# Altium PCB TIDA-010954-RevB.PcbDoc (part 7 of 8)
Units mm, origin at the board's own origin, x right, y up, seen from the top; angles counter-clockwise.
Board outline 290 x 100 mm, 6 copper layers (Top Layer, Mid1, Mid2, Mid3, Mid4, Bottom Layer), stack 1.59 mm thick; 394 components, 204 nets, 1137 pads, 2188 vias.
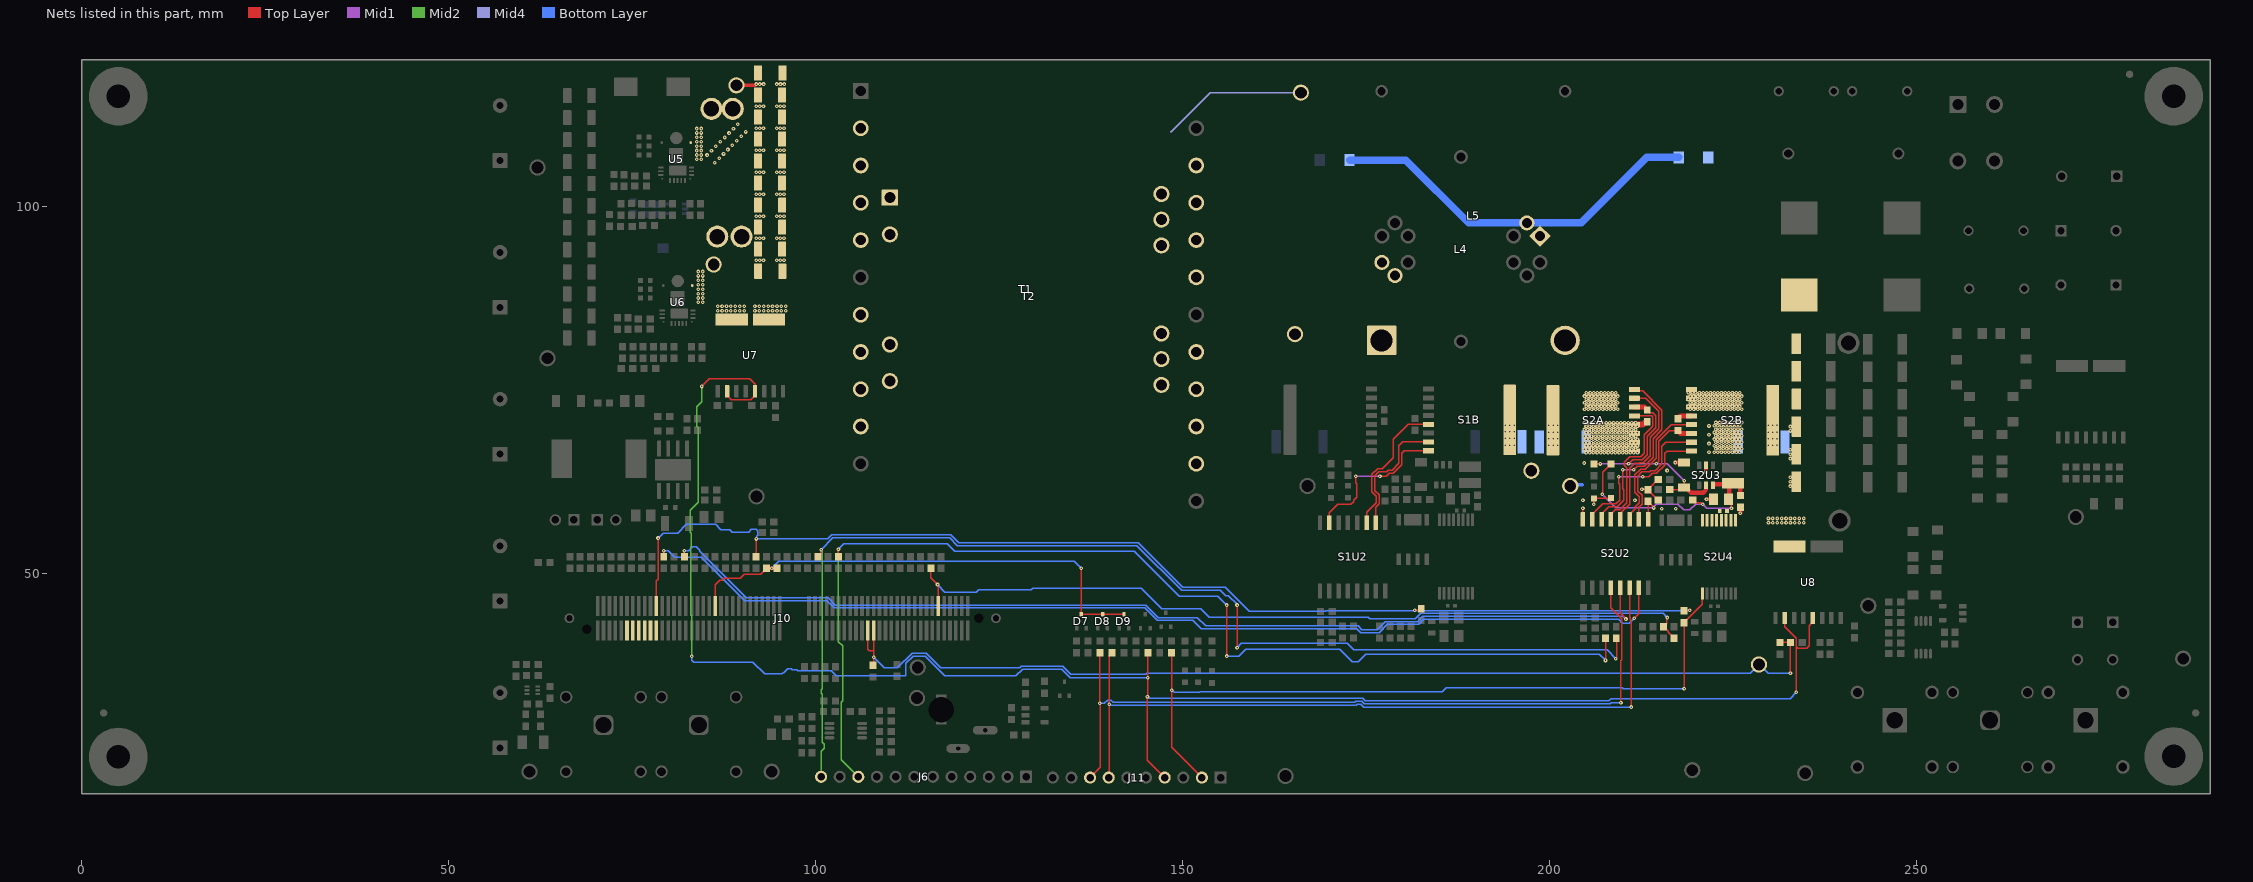
[diagram p9: the nets of this part, all layers, seen from the top]

## Via types
v1: diameter 0.5, hole 0.2, Top Layer to Bottom Layer, tented both sides, 1333 vias
v2: diameter 0.5/0.5/0.5/0.5/0.5/0.5 (per signal layer), hole 0.2, Top Layer to Bottom Layer, tented both sides, 847 vias
v3: diameter 0.63, hole 0.33, Top Layer to Bottom Layer, tented both sides, 6 vias
v4: diameter 0.5, hole 0.2, Top Layer to Bottom Layer, 1 vias
v5: diameter 0.5/0.5/0.5/0.5/0.5/0.5 (per signal layer), hole 0.2, Top Layer to Bottom Layer, 1 vias

## Nets (pads, with @x,y where several pads share a name; then routed paths per layer and width w, separated by ;. In a path a pad name is that pad's centre, name@x,y a point inside that pad or via, vN(x,y) a via of type N, cw(c..) or ccw(c..) an arc to the next point about the centre after c; other vN are vias at no path point) (continued)
S1SB_FLT: S1B.5 S1U2.3 | length 18.9
  Top Layer w0.2: S1U2.3@175.05,56.918 175.05,58.35 176.361,59.661 176.361,60.55 175.786,61.125 175.786,63.491 176.571,64.276 177.192,64.276 178.658,65.742 178.658,68.256 180.72,70.318 181.256,70.318 S1B.5@183.081,70.318
S1SB_IN: S1B.8 S1U2.7 | length 21.2
  Top Layer w0.2: S1U2.7@169.9,57 169.97,57.07 169.97,58.27 171.1,59.4 172.9,59.4 173.304,59.804 173.304,59.996 173.708,60.4 173.708,62.196 173.558,62.346 v1(173.558,63.23) ; v1(176.869,63.23) 177.697,63.23 178.136,63.669 178.707,63.669 179.858,64.821 179.858,66.405 180.172,66.718 S1B.8@183.481,66.718
  Mid1 w0.2: v1(173.558,63.23) v1(176.869,63.23)
S1SB_Z: S1B.7 S1U2.2 | length 17.4
  Top Layer w0.2: S1U2.2@176.32,56.918 176.32,59.055 176.761,59.496 176.761,60.716 176.186,61.291 176.186,63.325 176.736,63.876 177.777,63.876 177.97,64.069 178.541,64.069 179.458,64.987 179.458,67.391 179.986,67.918 S1B.7@183.481,67.918
S2_PWR_FLT: J11.2 R85.1 S2R11.1 S2U4.1 | length 102.8
  Top Layer w0.2: R85.1@148.5,39.2 v1(148.5,34.1) 148.5,26.32 152.4,22.42 J11.2@152.4,22.2 ; v1(218.3,34.3) S2R11.1@218.3,43.3 218.3,43.325 220.8,45.825 S2U4.1@220.8,47.2
  Bottom Layer w0.2: v1(148.5,34.1) 148.578,34.1 148.828,33.85 152.328,33.85 152.356,33.878 185.356,33.878 185.928,34.45 209.9,34.45 210.05,34.3 v1(218.3,34.3)
S2_TMP: C108.2 J10.11 S2C1.1 S2R1.2 | length 111.1
  Top Layer w0.2: C108.2@115.7,50.7 115.7,49.387 v1(116.6,48.487) 116.7,48.387 J10.11@116.7,45.6 ; S2C1.1@215.581,42.756 215.581,42.731 216.156,42.156 216.156,41.98 216.356,41.78 216.356,41.756 216.711,41.4 S2R1.2@216.8,41.4 ; S2C1.1@215.7,43.1 215.9,43.1 215.956,43.156 215.956,43.956 v1(216,44) ; S2R1.2@216.756,41.356 216.931,41.181 S2R1.2@216.931,41.156
  Bottom Layer w0.2: v1(116.6,48.487) 117.613,47.474 121.887,47.474 122.202,47.789 126.394,47.789 126.434,47.75 129.367,47.75 129.6,47.983 144.386,47.983 147.169,45.2 152.456,45.2 153.606,44.05 175.264,44.05 175.464,43.85 181.7,43.85 182.4,44.55 215.45,44.55 v1(216,44)
S2A_FLT: J11.8 R70.1 S2U2.12 | length 105.6
  Top Layer w0.2: J11.8@137.4,22.3 137.48,22.3 138.75,23.57 138.75,32.25 v1(138.7,32.3) 138.7,39.15 R70.1@138.75,39.2 ; S2U2.12@208.338,47.7 S2U2.12@208.338,48.172 ; S2U2.12@208.4,47.7 208.338,47.638 208.338,45.345 209.84,43.842 209.84,38.232 209.7,38.092 v1(209.7,32.4)
  Bottom Layer w0.2: v1(138.7,32.3) 139.322,32.3 139.772,32.75 140.228,32.75 140.528,32.45 173.457,32.45 173.607,32.6 174.393,32.6 174.727,32.267 208.232,32.267 208.366,32.4 v1(209.7,32.4)
S2A_G: J6.10 R76.1 S2R4.2 | length 153.5
  Top Layer w0.2: R76.1@103,52.3 103.1,52.4 v1(103.1,53.3) ; v1(156,38.75) v1(156,45.7) ; v1(207.6,38.15) 207.6,41 S2R4.2@207.7,41.1
  Mid2 w0.2: v1(103.1,53.3) 103.1,40.7 103.667,40.133 103.667,32.635 103.5,32.469 103.5,24.61 J6.10@105.81,22.3
  Bottom Layer w0.2: v1(103.1,53.3) 103.85,54.05 117.916,54.05 118.966,53 143.431,53 149.531,46.9 154.8,46.9 v1(156,45.7) ; v1@156,38.8 156.05,38.75 157.616,38.75 158.566,39.7 171.4,39.7 173.1,38 173.9,38 174.917,39.017 175.083,39.017 175.1,39 206.75,39 v1(207.6,38.15) v1@207.6,38.1
S2A_ZVD: R88.1 S2U2.13 | length 139.7
  Top Layer w0.2: R88.1@82.1,52.3 v1(82.1,53.1) ; S2U2.13@209.608,48.172 209.608,44.64 210.24,44.008 210.24,43.917 210.367,43.79 v1(210.39,43.79)
  Bottom Layer w0.2: v1(82.1,53.1) 82.679,53.1 83.229,53.65 83.728,53.65 84.2,53.178 84.2,53.022 90.522,46.7 101.698,46.7 102.698,45.7 144.972,45.7 146.676,43.995 151.964,43.995 153.109,42.85 173.9,42.85 174.4,42.35 176.5,42.35 177.6,43.45 182,43.45 182.7,44.15 209.972,44.15 210.333,43.79 v1(210.39,43.79)
S2B_FLT: J11.7 R71.1 S2U2.14 | length 105.1
  Top Layer w0.2: J11.7@140.1,22.2 140,22.3 140,38.825 R71.1@140.375,39.2 ; S2U2.14@210.878,48.172 210.878,44.044 210.94,43.982 210.94,43.682 211.1,43.522 v1(211.1,31.8)
  Bottom Layer w0.2: v1(140,32.2) 140.081,32.2 140.231,32.05 173.622,32.05 173.772,32.2 174.228,32.2 174.635,31.793 211.093,31.793 v1(211.1,31.8)
S2B_G: J6.12 R80.1 S2R6.2 | length 154.7
  Top Layer w0.2: R80.1@100.3,52.3 100.675,52.675 v1@100.675,53.094 ; v1(157.4,39.9) v1(157.4,45.7) ; v1(209,38.4) 209,38.481 209.1,38.581 S2R6.2@209.1,41
  Mid2 w0.2: J6.12@100.73,22.3 100.73,25.752 101.18,26.202 101.18,26.735 100.9,27.015 100.9,33.522 100.75,33.672 100.75,34.128 100.9,34.278 100.9,53.019 100.75,53.169 v1(100.75,53.25)
  Bottom Layer w0.2: v1(100.75,53.25) 102.35,54.85 118.247,54.85 119.297,53.8 143.763,53.8 149.863,47.7 155.131,47.7 155.892,46.939 156.239,46.939 157.4,45.778 v1(157.4,45.7) ; v1(157.4,39.9) 158,40.5 172.4,40.5 173.314,39.586 207.814,39.586 v1(209,38.4)
S2B_ZVD: R89.1 S2U2.15 | length 143.4
  Top Layer w0.2: R89.1@79.3,52.3 v1(79.3,53.1) ; v1(211.5,43.9) 211.5,44 211.502,43.998 211.598,43.998 212.148,44.548 S2U2.15@212.148,48.172
  Bottom Layer w0.2: v1(79.3,53.1) 79.922,53.1 80.794,52.228 84.428,52.228 90.356,46.3 101.532,46.3 102.532,45.3 144.806,45.3 146.51,43.595 151.377,43.595 152.523,42.45 173.734,42.45 174.234,41.95 176.75,41.95 177.85,43.05 182.166,43.05 182.866,43.75 209.4,43.75 209.91,43.24 210.84,43.24 v1(211.5,43.9)
S2DA: L4.1 L4.2 L5.2 S1B.9 S1D1.1 S1R3.1 S2A.9 S2D1.2 S2R2.2 TP27.1 | length 52.1
  Bottom Layer w1: S1D1.1@172.715,106.3 180.4,106.3 188.936,97.764 L4.2@196.88,97.764 204.3,97.764 213.236,106.7 S2D1.2@217.585,106.7
  other v1: 199.869,67.442 200.469,67.442 201.069,67.442 193.937,67.488 194.537,67.488 195.137,67.488 199.869,68.352 200.469,68.352 201.069,68.352 193.937,68.398 194.537,68.398 195.137,68.398 199.869,69.262 200.469,69.262 201.069,69.262 193.937,69.308 194.537,69.308 195.137,69.308 199.869,70.172 200.469,70.172 201.069,70.172 193.937,70.218 194.537,70.218 195.137,70.218
S2DB: C53.1 C57.1 C61.1 C63.1 C65.1 C67.1 L10.1 S2B.9 S2D1.1 S2R3.1
  other v1: 229.765,67.442 230.365,67.442 230.965,67.442 229.765,68.352 230.365,68.352 230.965,68.352 229.765,69.262 230.365,69.262 230.965,69.262 229.765,70.172 230.365,70.172 230.965,70.172
  other v2: 232.75,61.906 232.75,62.506 232.75,63.106 232.75,65.662 232.75,66.262 232.75,66.862 232.75,69.417 232.75,70.017
S2S_5V: S2C5.1 S2C9.2 S2C10.1 S2C11.2 S2L1.2 S2R9.2 S2R10.2 S2U2.1 S2U3.6 S2U4.9 S2U4.10 S2U4.11 | length 37.9
  Top Layer w0.2: v1(207.164,60.773) 207.233,60.843 207.233,63.794 208.338,64.898 S2R10.2@208.338,64.923 ; S2C5.1@213.364,59.823 213.418,59.769 S2C5.1@213.418,59.744 ; S2U2.1@213.418,57.822 S2C5.1@213.418,59.744 ; v1(214.164,58.923) 214.164,58.998 S2C5.1@213.418,59.744 ; S2R9.2@219.364,60.023 219.739,59.648 220.574,59.648 220.782,59.44 v1(220.864,59.44) ; S2C10.1@224.48,60.148 224.48,59.983 224.763,59.7 v1(224.763,58.908)
  Top Layer w0.5: S2L1.2@224.03,62.288 S2L1.2@224.48,61.838
  Top Layer w0.6: S2U3.6@222.245,62.013 222.245,62.15 223.892,62.15 S2L1.2@224.03,62.288 ; S2C10.1@224.48,60.148 224.48,61.838 224.48,61.888 224.88,62.288 S2L1.2@224.942,62.288 225.564,62.288 225.964,61.888 S2C9.2@225.964,60.623
  Mid1 w0.2: v1(207.164,60.773) 209.014,58.923 v1(214.164,58.923) 214.164,59.123 214.48,59.44 217.472,59.44 218.255,58.657 219.097,58.657 219.88,59.44 220.874,59.44 220.874,59.43 221.395,58.908 v1(224.763,58.908)
S2S_10V: S2A.6 S2B.6 S2C3.1 S2C4.1 S2C12.1 S2R8.2 S2R12.2 S2U3.5 | length 41.5
  Top Layer w0.2: S2R8.2@206.021,64.923 v1(206.887,64.923) ; v1(210.736,64.951) 211.287,65.502 212.595,65.502 213.286,66.193 213.286,68.707 214.461,69.882 214.461,71.462 214.051,71.872 213.661,71.872 213.286,72.247 S2C4.1@213.286,72.272 ; S2A.6@211.525,72.672 S2A.6@211.925,72.672 ; v1(214.499,64.932) 214.499,64.936 214.886,65.323 214.886,68.045 216.314,69.472 S2C3.1@217.459,69.472 ; S2R12.2@216.364,61.423 218.017,61.423 S2C12.1@218.306,61.712 218.326,61.733 v1(218.326,62.613)
  Top Layer w0.6: S2C12.1@218.306,61.712 218.556,61.712 219.262,61.006 220.917,61.006 221.295,61.384 S2U3.5@221.295,62.013
  Top Layer w0.7: S2A.6@211.525,72.672 212.346,72.672 212.886,72.672 213.136,72.422 213.161,72.422 213.286,72.297 S2C4.1@213.286,72.272 ; S2C3.1@217.459,69.472 217.459,69.447 217.534,69.372 217.559,69.372 217.859,69.072 S2B.6@219.309,69.072
  Mid1 w0.2: v1(206.887,64.923) 210.708,64.923 v1(210.736,64.951) 214.499,64.951 215.988,64.951 v1(218.326,62.613)
S2S_SRC: S2A.1 S2A.2 S2A.3 S2A.4 S2B.1 S2B.2 S2B.3 S2B.4 S2C3.2 S2C4.2 S2C5.2 S2C9.1 S2C10.2 S2C11.1 S2C12.2 S2D2.2 S2D3.1 S2R2.1 S2R3.2 S2R13.1 S2R14.1 S2TP1.1 S2U2.8 S2U3.2 S2U4.12 S2U4.13 S2U4.14 S2U4.15 S2U4.16 | length 19.1
  Top Layer w0.2: S2U2.8@204.528,57.472 v1(204.528,58.908) ; v1(206.021,59.44) S2D3.1@206.021,60.223 208.198,60.223 S2D2.2@208.338,60.363 ; v1(212.564,61.473) 213.214,61.473 S2C5.2@213.264,61.523 ; S2R13.1@214.764,60.023 214.739,60.023 213.739,61.023 213.739,61.048 S2C5.2@213.364,61.423 213.364,61.448 213.739,61.823 213.741,61.823 214.741,62.823 S2R14.1@214.764,62.823 ; S2C10.2@222.423,60.123 S2C10.2@222.448,60.148
  Top Layer w0.5: v1(217.084,65.113) S2C12.2@218.306,65.112 ; v1(221.295,63.823) S2U3.2@221.295,64.763 ; v1(221.364,60.123) S2C10.2@222.423,60.123 ; S2C9.1@225.964,59.023 225.991,58.996 225.991,58.203 v1(225.977,58.189)
  Top Layer w0.7: S2C3.2@217.459,71.072 217.459,71.097 217.834,71.472 S2B.4@219.309,71.472
  Top Layer w0.8: S2A.4@211.525,70.272 212.696,70.272 212.996,70.572 213.211,70.572 213.286,70.647 S2C4.2@213.286,70.672
  Bottom Layer w0.5: S2TP1.1@202.8,61.919 202.981,62.1 204.4,62.1
  other v1: 211.614,59.968 204.95,66.47 205.45,66.47 205.95,66.47 206.45,66.47 206.95,66.47 207.45,66.47 207.95,66.47 208.45,66.47 208.95,66.47 209.45,66.47 209.95,66.47 210.45,66.47 210.95,66.47 211.45,66.47 211.95,66.47 221.7,66.5 222.395,66.523 222.895,66.523 223.395,66.523 223.895,66.523 224.395,66.523 224.895,66.523 225.395,66.523 225.895,66.523 204.695,66.91 205.195,66.91 205.695,66.91 206.195,66.91 206.695,66.91 207.195,66.91 207.695,66.91 208.195,66.91 208.695,66.91 209.195,66.91 209.695,66.91 210.195,66.91 210.695,66.91 211.195,66.91 211.695,66.91 222.65,66.97 223.15,66.97 223.65,66.97 224.15,66.97 224.65,66.97 225.15,66.97 225.65,66.97 226.15,66.97 204.95,67.37 205.45,67.37 205.95,67.37 206.45,67.37 206.95,67.37 207.45,67.37 207.95,67.37 208.45,67.37 208.95,67.37 209.45,67.37 209.95,67.37 210.45,67.37 210.95,67.37 211.45,67.37 211.95,67.37 222.395,67.41 222.895,67.41 223.395,67.41 223.895,67.41 224.395,67.41 224.895,67.41 225.395,67.41 225.895,67.41 221.7,67.7 204.695,67.81 205.195,67.81 205.695,67.81 206.195,67.81 206.695,67.81 207.195,67.81 207.695,67.81 208.195,67.81 208.695,67.81 209.195,67.81 209.695,67.81 210.195,67.81 210.695,67.81 211.195,67.81 211.695,67.81 222.65,67.87 223.15,67.87 223.65,67.87 224.15,67.87 224.65,67.87 225.15,67.87 225.65,67.87 226.15,67.87 204.95,68.27 205.45,68.27 205.95,68.27 206.45,68.27 206.95,68.27 207.45,68.27 207.95,68.27 208.45,68.27 208.95,68.27 209.45,68.27 209.95,68.27 210.45,68.27 210.95,68.27 211.45,68.27 211.95,68.27 222.395,68.31 222.895,68.31 223.395,68.31 223.895,68.31 224.395,68.31 224.895,68.31 225.395,68.31 225.895,68.31 204.695,68.71 205.195,68.71 205.695,68.71 206.195,68.71 206.695,68.71 207.195,68.71 207.695,68.71 208.195,68.71 208.695,68.71 209.195,68.71 209.695,68.71 210.195,68.71 210.695,68.71 211.195,68.71 211.695,68.71 222.65,68.77 223.15,68.77 223.65,68.77 224.15,68.77 224.65,68.77 225.15,68.77 225.65,68.77 226.15,68.77 221.7,68.9 204.95,69.17 205.45,69.17 205.95,69.17 206.45,69.17 206.95,69.17 207.45,69.17 207.95,69.17 208.45,69.17 208.95,69.17 209.45,69.17 209.95,69.17 210.45,69.17 210.95,69.17 211.45,69.17 211.95,69.17 222.395,69.21 222.895,69.21 223.395,69.21 223.895,69.21 224.395,69.21 224.895,69.21 225.395,69.21 225.895,69.21 204.695,69.61 205.195,69.61 205.695,69.61 206.195,69.61 206.695,69.61 207.195,69.61 207.695,69.61 208.195,69.61 208.695,69.61 209.195,69.61 209.695,69.61 210.195,69.61 210.695,69.61 211.195,69.61 211.695,69.61 222.65,69.67 223.15,69.67 223.65,69.67 224.15,69.67 224.65,69.67 225.15,69.67 225.65,69.67 226.15,69.67 204.95,70.07 205.45,70.07 205.95,70.07 206.45,70.07 206.95,70.07 207.45,70.07 207.95,70.07 208.45,70.07 208.95,70.07 209.45,70.07 209.95,70.07 210.45,70.07 210.95,70.07 211.45,70.07 211.95,70.07 221.7,70.1 222.395,70.11 222.895,70.11 223.395,70.11 223.895,70.11 224.395,70.11 224.895,70.11 225.395,70.11 225.895,70.11 204.695,70.51 205.195,70.51 205.695,70.51 206.195,70.51 206.695,70.51 207.195,70.51 207.695,70.51 208.195,70.51 208.695,70.51 209.195,70.51 209.695,70.51 210.195,70.51 210.695,70.51 211.195,70.51 211.695,70.51 222.65,70.57 223.15,70.57 223.65,70.57 224.15,70.57 224.65,70.57 225.15,70.57 225.65,70.57 226.15,70.57 204.75,72.37 205.25,72.37 205.75,72.37 206.25,72.37 206.75,72.37 207.25,72.37 207.75,72.37 208.25,72.37 208.75,72.37 209.25,72.37 219.15,72.37 219.65,72.37 220.15,72.37 220.65,72.37 221.15,72.37 221.65,72.37 222.15,72.37 222.65,72.37 223.15,72.37 223.65,72.37 224.15,72.37 224.65,72.37 225.15,72.37 225.65,72.37 226.15,72.37 204.995,72.81 205.495,72.81 205.995,72.81 206.495,72.81 206.995,72.81 207.495,72.81 207.995,72.81 208.495,72.81 208.995,72.81 218.895,72.81 219.395,72.81 219.895,72.81 220.395,72.81 220.895,72.81 221.395,72.81 221.895,72.81 222.395,72.81 222.895,72.81 223.395,72.81 223.895,72.81 224.395,72.81 224.895,72.81 225.395,72.81 225.895,72.81 204.75,73.27 205.25,73.27 205.75,73.27 206.25,73.27 206.75,73.27 207.25,73.27 207.75,73.27 208.25,73.27 208.75,73.27 209.25,73.27 219.15,73.27 219.65,73.27 220.15,73.27 220.65,73.27 221.15,73.27 221.65,73.27 222.15,73.27 222.65,73.27 223.15,73.27 223.65,73.27 224.15,73.27 224.65,73.27 225.15,73.27 225.65,73.27 226.15,73.27 204.995,73.71 205.495,73.71 205.995,73.71 206.495,73.71 206.995,73.71 207.495,73.71 207.995,73.71 208.495,73.71 208.995,73.71 218.895,73.71 219.395,73.71 219.895,73.71 220.395,73.71 220.895,73.71 221.395,73.71 221.895,73.71 222.395,73.71 222.895,73.71 223.395,73.71 223.895,73.71 224.395,73.71 224.895,73.71 225.395,73.71 225.895,73.71 204.75,74.17 205.25,74.17 205.75,74.17 206.25,74.17 206.75,74.17 207.25,74.17 207.75,74.17 208.25,74.17 208.75,74.17 209.25,74.17 219.15,74.17 219.65,74.17 220.15,74.17 220.65,74.17 221.15,74.17 221.65,74.17 222.15,74.17 222.65,74.17 223.15,74.17 223.65,74.17 224.15,74.17 224.65,74.17 225.15,74.17 225.65,74.17 226.15,74.17 204.995,74.61 205.495,74.61 205.995,74.61 206.495,74.61 206.995,74.61 207.495,74.61 207.995,74.61 208.495,74.61 208.995,74.61 218.895,74.61 219.395,74.61 219.895,74.61 220.395,74.61 220.895,74.61 221.395,74.61 221.895,74.61 222.395,74.61 222.895,74.61 223.395,74.61 223.895,74.61 224.395,74.61 224.895,74.61 225.395,74.61 225.895,74.61
  other v2: 215.281,58.823 217.186,58.823 204.528,59.983 215.989,64.023 204.695,65.05
S2SA_FLT: S2A.5 S2U2.5 | length 20.3
  Top Layer w0.2: S2U2.5@208.338,57.472 208.338,58.072 208.938,58.672 209.542,58.672 210.485,59.616 210.485,64.424 210.186,64.723 210.186,65.179 210.909,65.902 212.429,65.902 212.886,66.359 212.886,68.873 214.061,70.048 214.061,71.297 213.885,71.472 S2A.5@211.525,71.472
S2SA_IN: S2A.8 S2U2.6 | length 25.5
  Top Layer w0.2: S2U2.6@207.068,57.472 207.068,58.172 207.168,58.172 208.068,59.072 209.19,59.072 210.085,59.968 210.085,61.384 209.935,61.534 v1(209.935,64.123) ; v1(211.464,64.123) 211.396,64.123 211.902,64.63 212.854,64.63 214.086,65.862 214.086,68.376 215.261,69.551 215.261,72.262 212.652,74.871 211.726,74.871 S2A.8@211.525,75.072
  Mid1 w0.2: v1(209.935,64.123) v1(211.464,64.123)
S2SA_Z: S2A.7 S2U2.4 | length 21.5
  Top Layer w0.2: S2U2.4@209.608,57.472 209.608,58.172 210.885,59.45 210.885,64.323 211.593,65.03 212.204,65.03 212.276,65.102 212.761,65.102 213.686,66.028 213.686,68.542 214.861,69.717 214.861,72.097 213.085,73.872 S2A.7@211.525,73.872
S2SB_FLT: S2B.5 S2U2.3 | length 18.4
  Top Layer w0.2: S2U2.3@210.878,57.372 210.878,58.072 211.633,58.828 211.633,59.06 212.189,59.616 212.189,60.483 211.614,61.058 211.614,63.445 212.398,64.23 213.02,64.23 214.486,65.696 214.486,68.21 216.548,70.272 217.084,70.272 S2B.5@218.909,70.272
S2SB_IN: S2B.8 S2U2.7 | length 20.7
  Top Layer w0.2: S2U2.7@205.798,57.472 205.798,58.072 207.198,59.472 209.024,59.472 209.535,59.983 209.535,62.15 209.385,62.3 v1(209.385,63.184) ; v1(212.696,63.184) 213.525,63.184 213.964,63.623 214.534,63.623 215.686,64.775 215.686,66.359 215.999,66.672 S2B.8@219.309,66.672
  Mid1 w0.2: v1(209.385,63.184) v1(212.696,63.184)
S2SB_Z: S2B.7 S2U2.2 | length 16.9
  Top Layer w0.2: S2U2.2@212.148,57.372 212.148,59.009 212.589,59.45 212.589,60.649 212.014,61.224 212.014,63.208 212.014,63.28 212.564,63.83 213.605,63.83 213.798,64.023 214.368,64.023 215.286,64.941 215.286,67.345 215.814,67.872 S2B.7@219.309,67.872
S_PWR: J10.99 R84.2 S1R11.2 S2R11.2 | length 160.9
  Top Layer w0.2: J10.99@78.3,46.4 78.3,49 78.525,49.225 v1(78.525,54.825) ; v1(91.9,54.7) 91.9,52.4 R84.2@92,52.3 ; v1(181.6,45) 182.3,45 S1R11.2@182.5,45.2 ; S2R11.2@218.2,45 v1(219.1,45)
  Bottom Layer w0.2: v1(78.525,54.825) 79.2,55.5 81.2,55.5 82.4,56.7 86.367,56.7 87.083,55.984 88.3,55.984 88.649,55.635 90.87,55.635 91.25,56.015 91.885,56.015 92.115,55.785 92.115,55.219 91.957,55.062 91.957,54.757 v1(91.9,54.7) 101.634,54.7 102.184,55.25 118.413,55.25 119.463,54.2 143.928,54.2 150.028,48.1 155.8,48.1 159.05,44.85 169.389,44.85 169.489,44.95 219.05,44.95 v1(219.1,45)
SEC_CS: C17.1 C39.1 J10.34 J10.36 R36.2 TP8.1 | length 142.5
  Top Layer w0.2: J10.36@107.1,42.2 107.1,39.7 107.3,39.5 107.9,39.5 ; C39.1@107.8,37.5 107.9,37.6 v1(107.9,38.6) 107.9,39.5 ; J10.34@107.9,42.2 107.9,39.5 ; C17.1@231.7,40.6 R36.2@232.8,40.6 ; v1(232.8,36.4) R36.2@232.8,40.6 ; R36.2@233,40.9 232.8,40.7 R36.2@232.8,40.6
  Bottom Layer w0.2: v1(107.9,38.6) 109.35,37.15 111.127,37.15 113.133,39.156 115.061,39.156 117.066,37.15 127.819,37.15 128.019,37.35 133.666,37.35 134.716,36.3 144.972,36.3 145.072,36.4 227.3,36.4 TP8.1@228.5,37.6 228.563,37.6 229.763,36.4 v1(232.8,36.4)
SPI_CLK: J10.104
SPI_COMM_CS: J10.106
SPI_MISO: J10.102
SPI_MOSI: J10.100
SW_L1: C47.2 C48.2 C49.2 C50.2 C51.2 C52.2 C55.2 C56.2 C59.2 C60.2 pad.1@85.8,113.3 pad.1@86.6,95.9 pad.1@88.7,113.3 pad.1@89.9,95.9 TP10.1 U5.5 | length 3
  Top Layer w0.5: TP10.1@89.05,116.35 TP10.1@89.2,116.5 91.725,116.5 v2(91.9,116.675)
  other v2: 91.882,92.675 92.382,92.675 92.882,92.675 91.882,95.675 92.382,95.675 92.882,95.675 91.882,98.675 92.382,98.675 92.882,98.675 91.882,101.675 92.382,101.675 92.882,101.675 91.882,104.675 92.382,104.675 92.882,104.675 86.25,105.95 83.797,106.413 84.397,106.413 86.85,106.55 83.797,107.013 84.397,107.013 85.2,107 87.45,107.15 85.8,107.6 83.797,107.613 84.397,107.613 91.882,107.675 92.382,107.675 92.882,107.675 88.05,107.75 83.797,108.213 84.397,108.213 86.4,108.2 88.65,108.35 87,108.8 83.797,108.813 84.397,108.813 89.25,108.95 87.6,109.4 83.797,109.413 84.397,109.413 89.85,109.55 83.797,110.013 84.397,110.013 88.2,110 90.45,110.15 88.8,110.6 83.797,110.613 84.397,110.613 91.882,110.675 92.382,110.675 92.882,110.675 89.4,111.2 91.882,113.675 92.382,113.675 92.882,113.675 92.4,116.675 92.9,116.675
SW_L2: TP13.1 U6.5 U7.2
  other v2: 86.648,85.804 87.248,85.804 87.848,85.804 88.448,85.804 89.048,85.804 89.648,85.804 90.248,85.804 86.648,86.404 87.248,86.404 87.848,86.404 88.448,86.404 89.048,86.404 89.648,86.404 90.248,86.404 83.997,86.931 84.597,86.931 83.997,87.531 84.597,87.531 83.997,88.131 84.597,88.131 83.997,88.731 84.597,88.731 83.997,89.331 84.597,89.331 83.997,89.931 84.597,89.931 83.997,90.531 84.597,90.531 83.997,91.131 84.597,91.131
SWITCH_FLT: C117.1 D7.3 D8.3 D9.3 J10.79 R68.1 | length 66.4
  Top Layer w0.2: J10.79@86.3,46.4 86.3,48.484 86.916,49.1 87.256,49.1 87.486,49.33 89.73,49.33 90.3,49.9 92.525,49.9 C117.1@93.313,50.687 ; D7.3@136.2,44.45 v1(136.2,50.7) ; D7.3@136.335,44.45 D9.3@142,44.45
  Top Layer w0.5: C117.1@93.3,50.7 R68.1@94.7,50.7
  Bottom Layer w0.2: v1(94,50.7) 95,51.7 135.2,51.7 v1(136.2,50.7)
T1_1: C47.1 C48.1 C49.1 C50.1 C51.1 C52.1 C55.1 C56.1 C59.1 C60.1 T1.1 T1.2 T2.2 T2.3 T2.4 T2.5 | length 0
  Top Layer w0.2: 96.6,118.5 96.622,118.522
  other v2: 94.682,92.675 95.182,92.675 95.682,92.675 94.682,95.675 95.182,95.675 95.682,95.675 94.682,98.675 95.182,98.675 95.682,98.675 94.682,101.675 95.182,101.675 95.682,101.675 94.682,104.675 95.182,104.675 95.682,104.675 94.682,107.675 95.182,107.675 95.682,107.675 94.682,110.675 95.182,110.675 95.682,110.675 94.682,113.675 95.182,113.675 95.682,113.675 94.7,116.675 95.2,116.675 95.7,116.675
T1_2: T1.3 T1.4 T2.7 T2.8 T2.9 T2.10 U7.1
  other v2: 91.728,85.804 92.328,85.804 92.928,85.804 93.528,85.804 94.128,85.804 94.728,85.804 95.328,85.804 95.928,85.804 91.728,86.404 92.328,86.404 92.928,86.404 93.528,86.404 94.128,86.404 94.728,86.404 95.328,86.404 95.928,86.404
T1_3: L4.7 L4.8 L5.1 T1.5 T1.6 T1.7 T2.13 T2.14 T2.15 T2.16 TP14.1
T1_4: T1.8 T1.9 T1.10 T2.18 T2.19 T2.20 T2.21 TP12.1 U8.2 | length 20
  Mid4 w0.2: 148.3,110.2 148.46,110.2 148.5,110.24 153.76,115.5 TP12.1@166.1,115.5
  other v2: 229.8,56.9 230.4,56.9 231,56.9 231.6,56.9 232.2,56.9 232.8,56.9 233.4,56.9 234,56.9 234.6,56.9 229.8,57.5 230.4,57.5 231,57.5 231.6,57.5 232.2,57.5 232.8,57.5 233.4,57.5 234,57.5 234.6,57.5
UART_RX: J10.110
UART_TX: J10.108
XFMR_CS_FLT: J11.4 R66.1 U7.4 U7.7 U8.4 U8.7 | length 243.7
  Top Layer w0.2: v1(84.5,75.482) 85.518,76.5 91.018,76.5 91.735,75.783 U7.7@91.735,74.825 91.735,74.3 91.135,73.7 88.525,73.7 87.925,74.3 U7.4@87.925,74.825 ; R66.1@145.25,39.2 v1(145.25,35.8) 145.225,35.775 145.225,33.225 v1(145.2,33.2) 145.2,24.54 147.5,22.24 J11.4@147.5,22.2 ; U8.4@232.025,43.925 232.025,42.774 233.6,41.199 233.6,40.001 ; v1(233.6,33.8) 233.6,40.001 ; U8.7@235.8,43.6 235.8,43.365 235.33,42.895 235.33,40.13 235.024,39.825 233.776,39.825 233.6,40.001
  Mid2 w0.2: v1(83.1,38.703) 83.1,44.25 82.95,44.4 82.95,53.6 83.015,53.665 83.015,55.463 82.885,55.593 82.885,58.6 84,59.715 84,69.864 83.8,70.064 83.8,72.692 84.5,73.392 v1(84.5,75.482)
  Bottom Layer w0.2: v1(83.1,38.703) 83.1,38.2 83.4,37.9 91.45,37.9 93.034,36.316 95.4,36.316 95.591,36.506 95.628,36.506 96.172,37.05 96.672,37.05 96.822,36.9 97.388,36.9 97.572,36.716 102.106,36.716 102.771,36.05 112.281,36.05 112.281,37.738 113.299,38.756 114.895,38.756 117.601,36.05 127.284,36.05 128.184,36.95 133.5,36.95 134.65,35.8 v1(145.25,35.8) ; v1(145.2,33.2) 145.267,33.2 145.467,33 174.559,33 174.892,32.667 208.067,32.667 208.365,32.965 232.765,32.965 v1(233.6,33.8)
pads on no net: D9.2 D12.2 FID1.1 FID2.1 FID3.1 H1.1 H2.1 H3.1 H4.1 H5.0 H6.0 H7.0 H8.0 J1.2 J1.3 J1.4 J1.5 J2.2 J2.3 J2.4 J2.5 J3.2 J3.3 J3.4 J3.5 J4.2 J4.3 J4.4 J4.5 J5.2 J5.3 J5.4 J5.5 J10.1 J10.2 J10.3 J10.4 J10.5 J10.6 J10.8 J10.12 J10.14 J10.15 J10.18 J10.20 J10.21 J10.26 J10.27 J10.28 J10.30 J10.32 J10.37 J10.40 J10.41 J10.42 J10.43 J10.44 J10.57 J10.58 J10.60 J10.61 J10.62 J10.63 J10.64 J10.66 J10.67 J10.68 J10.69 J10.70 J10.71 J10.72 J10.73 J10.74 J10.76 J10.86 J10.88 J10.90 J10.92 J10.93 J10.95 J10.109 J10.113 J10.114 J10.115 J10.116 J10.117 J10.118 J10.120 J10.181 J10.182 J10.185 J10.186 L4.3 L4.4 L4.5 L4.6 L4.9 L4.10 L4.11 L4.12 L4.13 L4.14 L5.3 L5.4 LBL1.0 S1U1.2 S1U1.5 S1U1.6 S1U1.7 S2U1.2 S2U1.5 S2U1.6 S2U1.7 T2.1 T2.6 T2.11 T2.12 T2.17 T2.22 U7.5 U8.5 U9.1 U9.5 U13.4 U14.10 U16.1 U16.3

## Polygon pours and split planes (outlines as drawn)
S1S_SRC on Mid2 "MID2_S1S_SRC_P142" (solid, remove dead copper, pour order 142): 168.436,66 185.8,66 185.8,63 190.636,63 190.636,56.569 168.436,56.569
PGND on Mid2 "MID2_PGND_P139" (solid, remove dead copper, pour order 139): 0.102,120.987 0.102,19.987 57.3,20 57.3,64.75 86.102,64.75 86.102,82.987 86.102,84.987 85.102,85.987 85.102,120.987
GND on Mid2 "MID2_GND_P056" (solid, remove dead copper, pour order 56): 57.6,79.4 96.7,79.4 96.7,69.5 105.2,61 137.7,61 150.1,48.6 177.3,48.6 184.5,48.6 184.5,47.9 184.9,47.5 255.2,47.5 268.1,60.4 268.1,69.2 268.9,70 278.5,70 279.1,69.4 279.1,59.5 256.8,37.2 239.1,37.2 236,34.1 236,20 64,20.1 57.6,20.1
DAB_POWER on Mid2 "MID2_DAB_POWER_P055" (solid, remove dead copper, pour order 55): 68.1,114 68.1,78.9 79.9,78.9 79.9,114
PVIN on Mid2 "MID2_PVIN_P076" (solid, remove dead copper, pour order 76): 85,114.6 82.4,112 72,112 70,114 66.1,114 64,112 55,112 55,119.353 55.147,119.5 85,119.5
S1S_SRC on Mid2 "MID2_S1S_SRC_P135" (solid, remove dead copper, pour order 135): 168.486,74.946 190.686,74.946 190.686,65.846 168.486,65.846
S2S_SRC on Mid2 "MID2_S2S_SRC_P127" (solid, remove dead copper, pour order 127): 204.264,65.9 222,65.9 222,63.3 226.499,63.3 226.464,56.523 204.264,56.523
S2S_SRC on Mid2 "MID2_S2S_SRC_P128" (solid, remove dead copper, pour order 128): 204.314,74.9 226.514,74.9 226.514,65.8 204.314,65.8
S1S_SRC on Mid2 "Mid2-S2S_SRC" (solid, remove dead copper, pour order 117): 186.272,66.396 190.672,66.396 190.672,75.696 186.372,75.696 182.672,75.696 182.672,71.196 186.272,71.196
S1S_SRC on Mid2 "Mid2-S2S_SRC 1" (solid, remove dead copper, pour order 116): 168.372,66.361 176.472,66.361 176.472,70.761 173.672,70.761 173.672,75.561 168.372,75.561 168.372,70.761
S2S_SRC on Mid2 "Mid2-S2S_SRC 1" (solid, remove dead copper, pour order 103): 204.2,66.316 212.3,66.316 212.3,70.716 209.5,70.716 209.5,75.516 204.2,75.516 204.2,70.716
S2S_SRC on Mid2 "Mid2-S2S_SRC" (solid, remove dead copper, pour order 104): 222.1,66.35 226.5,66.35 226.5,75.65 222.2,75.65 218.5,75.65 218.5,71.15 222.1,71.15
GND on Mid3 "MID3_GND_P150" (solid, remove dead copper, pour order 150): 57.6,79.4 96.7,79.4 96.7,69.5 105.2,61 137.7,61 150.1,48.6 177.3,48.6 184.5,48.6 184.5,47.9 184.9,47.5 255.2,47.5 268.1,60.4 268.1,69.2 268.9,70 278.5,70 279.1,69.4 279.1,59.5 256.8,37.2 239.1,37.2 236,34.1 236,20 64,20.1 57.6,20.1
PGND on Mid3 "MID3_PGND_P149" (solid, remove dead copper, pour order 149): 0.102,120.987 0.102,19.987 57.3,20 57.3,64.75 86.102,64.75 86.102,82.987 86.102,84.987 85.102,85.987 85.102,120.987
S1S_SRC on Mid3 "MID3_S1S_SRC_P121" (solid, remove dead copper, pour order 121): 168.486,74.946 190.686,74.946 190.686,65.846 168.486,65.846
S1S_SRC on Mid3 "MID3_S1S_SRC_P120" (solid, remove dead copper, pour order 120): 168.436,65.9 190.636,65.9 190.636,56.569 168.436,56.569
S2S_SRC on Mid3 "MID3_S2S_SRC_P004" (solid, remove dead copper, pour order 4): 204.264,65.9 226.464,65.9 226.464,56.523 204.264,56.523
S2S_SRC on Mid3 "MID3_S2S_SRC_P108" (solid, remove dead copper, pour order 108): 204.314,74.9 226.514,74.9 226.514,65.8 204.314,65.8
S1S_SRC on Mid3 "MID3_S1S_SRC_P107" (solid, remove dead copper, pour order 107): 186.272,66.346 190.672,66.346 190.672,70.846 186.272,70.846
S1S_SRC on Mid3 "MID3_S1S_SRC_P100" (solid, remove dead copper, pour order 100): 168.572,66.346 168.572,70.746 176.472,70.746 176.472,66.346
S2S_SRC on Mid3 "MID3_S2S_SRC_P066" (solid, remove dead copper, pour order 66): 204.4,66.3 204.4,70.7 212.3,70.7 212.3,66.3
S1DA on Mid3 "MID3_S1DA_P081" (solid, remove dead copper, pour order 81): 160.4,71 160.4,78.4 251,78.4 251,71
S2S_SRC on Mid3 "MID3_S2S_SRC_P067" (solid, remove dead copper, pour order 67): 222.1,66.3 226.5,66.3 226.5,70.8 222.1,70.8
PVIN on Mid3 "MID3_PVIN_P061" (solid, remove dead copper, pour order 61): 91,20 91,36 56,36 56,20
S1S_SRC on Mid1 "MID1_S1S_SRC_P129" (solid, remove dead copper, pour order 129): 168.486,74.946 190.686,74.946 190.686,65.846 168.486,65.846
PGND on Mid1 "MID1_PGND_P146" (solid, remove dead copper, pour order 146): 0.102,120.987 0.102,19.987 112.102,19.987 112.102,66.987 102.102,66.987 97.102,71.987 97.102,82.987 86.102,82.987 86.102,84.987 85.102,85.987 85.102,120.987
GND on Mid1 "MID1_GND_P132" (solid, remove dead copper, pour order 132): 85.1,105.6 82.8,105.6 82.8,103.9 79.6,103.9 79.6,103.1 79.3,102.8 78.9,102.8 77.6,101.5 73.1,101.5 71.2,99.6 71.2,98.9 70.3,98 64,98 64,95.7 80.7,95.7 82.1,97.1 85.1,97.1
S1S_SRC on Mid1 "MID1_S1S_SRC_P130" (solid, remove dead copper, pour order 130): 168.436,65.9 185.8,65.9 185.8,63 190.636,63 190.636,56.569 168.436,56.569
S2S_SRC on Mid1 "MID1_S2S_SRC_P119" (solid, remove dead copper, pour order 119): 204.314,74.9 226.514,74.9 226.514,65.8 204.314,65.8
S2S_SRC on Mid1 "MID1_S2S_SRC_P118" (solid, remove dead copper, pour order 118): 204.264,65.9 221.7,65.9 221.7,63.1 226.5,63.1 226.464,56.523 204.264,56.523
GND on Mid1 "MID1_GND_P002" (solid, remove dead copper, pour order 2): 64.5,99.1 64.5,93.288 62.69,93.304 62.69,89.709 62.69,84.5 62.69,80 72,80 73.997,81.997 78.097,81.997 80.1,84 83,84 83,86.496 85.474,86.53 88.902,83.102 97,83 97,83.102 97,61 137.8,61 150.2,48.6 177.3,48.6 184.5,48.6 184.5,47.9 184.9,47.5 255.2,47.5 268.1,60.4 268.1,69.2 268.9,70 278.5,70 279.1,69.4 279.1,59.5 256.8,37.2 239.1,37.2 236,34.1 236,20 64,20.1 60.6,20.1 60.6,28.9 58,31.6 58,99.1
S1S_SRC on Mid1 "Mid1-S2S_SRC" (solid, remove dead copper, pour order 106): 168.372,66.346 176.472,66.346 176.472,70.746 173.672,70.746 173.672,75.546 168.372,75.546 168.372,70.746
S1S_SRC on Mid1 "Mid1-S2S_SRC 1" (solid, remove dead copper, pour order 105): 186.272,66.396 190.672,66.396 190.672,75.696 186.372,75.696 182.672,75.696 182.672,71.196 186.272,71.196
S2S_SRC on Mid1 "Mid1-S2S_SRC 1" (solid, remove dead copper, pour order 78): 222.1,66.35 226.5,66.35 226.5,75.65 222.2,75.65 218.5,75.65 218.5,71.15 222.1,71.15
S2S_SRC on Mid1 "Mid1-S2S_SRC" (solid, remove dead copper, pour order 79): 204.2,66.3 212.3,66.3 212.3,70.7 209.5,70.7 209.5,75.5 204.2,75.5 204.2,70.7
T1_3 on Mid1 "MID1_T1_3_P035" (solid, remove dead copper, pour order 35): 144,62.7 144,88 170.7,88 170.7,94 177.4,94 184.7,86.7 184.7,79 160,79 155,74 155,62.7
GND on Mid4 "MID4_GND_P148" (solid, remove dead copper, pour order 148): 57.6,79.4 96.7,79.4 96.7,69.5 105.2,61 137.7,61 150.1,48.6 177.3,48.6 184.5,48.6 184.5,47.9 184.9,47.5 255.2,47.5 268.1,60.4 268.1,69.2 268.9,70 278.5,70 279.1,69.4 279.1,59.5 256.8,37.2 239.1,37.2 236,34.1 236,20 64,20.1 57.6,20.1
DAB_POWER on Mid4 "MID4_DAB_POWER_P071" (solid, remove dead copper, pour order 71): 68.1,113.955 68.1,78.9 80,79 80,92.7 83.992,96.692 83.992,99.908 79.9,104 79.9,113.955
PVIN on Mid4 "MID4_PVIN_P074" (solid, remove dead copper, pour order 74): 85,114.6 82.4,112 72,112 70,114 66.1,114 64,112 55,112 55,119.353 55.147,119.5 85,119.5
PGND on Mid4 "MID4_PGND_P144" (solid, remove dead copper, pour order 144): 57,121 57,34 86,34 86,83 86,85 85,86 85,121
GND on Mid4 "MID4_GND_P063" (solid, remove dead copper, pour order 63): 80.7,98.6 71.5,98.6 70.9,98 64.5,98 64.5,99.1 59.4,99.1 59.4,93.4 63,93.4 63,94.7 78.7,94.8 80.7,96.8
S1S_SRC on Mid4 "MID4_S1S_SRC_P141" (solid, remove dead copper, pour order 141): 168.486,71 190.686,71 190.686,65.846 168.486,65.846
S1S_SRC on Mid4 "MID4_S1S_SRC_P137" (solid, remove dead copper, pour order 137): 168.436,65.9 190.636,65.9 190.636,56.569 168.436,56.569
S2S_SRC on Mid4 "MID4_S2S_SRC_P131" (solid, remove dead copper, pour order 131): 204.264,65.9 226.464,65.9 226.464,56.523 204.264,56.523
S2S_SRC on Mid4 "MID4_S2S_SRC_P134" (solid, remove dead copper, pour order 134): 204.314,71 226.514,71 226.514,65.8 204.314,65.8
S1S_SRC on Mid4 "Mid4-S2S_SRC" (solid, remove dead copper, pour order 125): 186.272,66.246 190.672,66.246 190.672,75.546 186.372,75.546 182.672,75.546 182.672,71.046 186.272,71.046
S1S_SRC on Mid4 "Mid4-S2S_SRC 1" (solid, remove dead copper, pour order 124): 168.372,66.346 176.472,66.346 176.472,70.746 173.672,70.746 173.672,75.546 168.372,75.546 168.372,70.746
S2S_SRC on Mid4 "Mid4-S2S_SRC 1" (solid, remove dead copper, pour order 114): 204.2,66.3 212.3,66.3 212.3,70.7 209.5,70.7 209.5,75.5 204.2,75.5 204.2,70.7
S2S_SRC on Mid4 "Mid4-S2S_SRC" (solid, remove dead copper, pour order 115): 222.1,66.2 226.5,66.2 226.5,75.5 222.2,75.5 218.5,75.5 218.5,71 222.1,71
PVIN on Mid4 "MID4_PVIN_P102" (solid, remove dead copper, pour order 102): 91,20 91,34 57,34 57,120 0,120 0,20
T1_4 on Mid4 "MID4_T1_4_P101" (solid, remove dead copper, pour order 101): 144,88 144,112 153,112 159,106 159,95 164.9,89.1 225.2,89.1 237.5,76.8 237.5,59.2 235.1,56.8 229.6,56.8 229.3,57.1 229.3,75.2 220.9,83.6 159.4,83.6 155,88
GND on Bottom Layer "BOTTOM_LAYER_GND_P147" (solid, remove dead copper, pour order 147): 57.6,79.4 96.7,79.4 96.7,69.5 105.2,61 137.7,61 150.1,48.6 177.3,48.6 184.5,48.6 184.5,47.9 184.9,47.5 255.2,47.5 268.1,60.4 268.1,69.2 268.9,70 278.5,70 279.1,69.4 279.1,59.5 256.8,37.2 239.1,37.2 236,34.1 236,20 64,20.1 57.6,20.1
PGND on Bottom Layer "BOTTOM_LAYER_PGND_P140" (solid, remove dead copper, pour order 140): 0.102,120.987 0.102,19.987 86.102,19.987 86.102,82.987 86.102,84.987 85.102,85.987 85.102,120.987
S1S_SRC on Bottom Layer "BOTTOM_LAYER_S1S_SRC_P123" (solid, remove dead copper, pour order 123): 168.486,71.1 190.686,71.1 190.686,65.846 168.486,65.846
S1S_SRC on Bottom Layer "BOTTOM_LAYER_S1S_SRC_P122" (solid, remove dead copper, pour order 122): 168.436,65.9 190.636,65.9 190.636,56.569 168.436,56.569
S2S_SRC on Bottom Layer "BOTTOM_LAYER_S2S_SRC_P113" (solid, remove dead copper, pour order 113): 204.314,71.1 226.514,71.1 226.514,65.8 204.314,65.8
S2S_SRC on Bottom Layer "BOTTOM_LAYER_S2S_SRC_P112" (solid, remove dead copper, pour order 112): 204.264,65.9 226.464,65.9 226.464,56.523 204.264,56.523
S1S_SRC on Bottom Layer "Bottom Layer-S2S_SRC" (solid, remove dead copper, pour order 99): 186.236,66.34 190.636,66.34 190.636,75.64 186.336,75.64 182.636,75.64 182.636,71.14 186.236,71.14
S1S_SRC on Bottom Layer "Bottom Layer-S2S_SRC 1" (solid, remove dead copper, pour order 98): 168.363,66.357 176.463,66.357 176.463,70.757 173.663,70.757 173.663,75.557 168.363,75.557 168.363,70.757
S2S_SRC on Bottom Layer "Bottom Layer-S2S_SRC" (solid, remove dead copper, pour order 75): 222.063,66.294 226.463,66.294 226.463,75.594 222.163,75.594 218.463,75.594 218.463,71.094 222.063,71.094
S2S_SRC on Bottom Layer "Bottom Layer-S2S_SRC 1" (solid, remove dead copper, pour order 73): 204.191,66.311 212.291,66.311 212.291,70.711 209.491,70.711 209.491,75.511 204.191,75.511 204.191,70.711
S2DB on Bottom Layer "BOTTOM_LAYER_S2DB_P059" (solid, remove dead copper, pour order 59): 235.5,67.475 235.5,91.5 230,97 230,114 228,116 223,116 221,114 221.01,113.99 221.01,81.966
S1DA on Bottom Layer "BOTTOM_LAYER_S1DA_P058" (solid, remove dead copper, pour order 58): 165.4,78.4 169,82 169,110 168,111 158,111 157,110 157,56 157.032,55.968 165.4,55.968
S2DA on Bottom Layer "BOTTOM_LAYER_S2DA_P047" (solid, remove dead copper, pour order 47): 196,100 191.3,95.3 191.3,79.3 193.4,77.2 193.4,66.036 197,62 198,62 201.4,65.4 201.4,76.767 205.2,80.567 205.2,93.2 198.4,100 197,100
T1_1 on Bottom Layer "BOTTOM_LAYER_T1_1_P029" (solid, remove dead copper, pour order 29): 91.5,99.9 96.9,99.9 98,101 98,109.7 95.5,112.2 91.5,112.2
DAB_POWER on Top Layer "TOP_LAYER_DAB_POWER_P060" (solid, remove dead copper, pour order 60): 70.7,113.9 70.7,112.9 65.7,112.9 65.7,113 65.7,113.9
S2DA on Top Layer "TOP_LAYER_S2DA_P057" (solid, remove dead copper, pour order 57): 196,100 191.3,95.3 191.3,79.3 193.4,77.2 193.4,66.036 197,62 198,62 201.4,65.4 201.4,76.767 205.2,79.3 205.2,93.2 198.4,100 197,100
GND on Top Layer "TOP_LAYER_GND_P045" (solid, remove dead copper, pour order 45): 57.6,75.861 93.171,75.629 106.8,62 137.4,62 150.8,48.6 177.3,48.6 178.6,49.9 178.6,50 184.5,50 184.5,47.9 184.9,47.5 255.2,47.5 268.1,60.4 268.1,69.2 268.9,70 278.5,70 279.1,69.4 279.1,59.5 256.8,37.2 239.1,37.2 236,34.1 236,20 64,20.1 57.6,20.1
PGND on Top Layer "TOP_LAYER_PGND_P053" (solid, remove dead copper, pour order 53): 53,120 53,76.2 88,76.2 88,83.1 75.886,83.1 72.7,86.784 72.7,91.5 77.9,91.5 81.4,95 93.7,95 93.7,120
DAB_POWER on Top Layer "TOP_LAYER_DAB_POWER_P050" (solid, remove dead copper, pour order 50): 69.6,86.7 64.8,86.7 64.8,95.365 69.6,95.365
PGND on Top Layer "TOP_LAYER_PGND_P039" (solid, remove dead copper, pour order 39): 0,120 0,20 60,20 60,29.7 60,120
SW_L1 on Top Layer "TOP_LAYER_SW_L1_P014" (solid, remove dead copper, pour order 14): 69.5,95.6 69.5,101.9 67.319,104.081 61.3,104.081 61.3,95.6

## Keep-outs
Keep-Out Layer:
  text ".Layer_Name" at 14.656,-21.806 h1.52